# EAGLE board Rocket Controller ver2.00 (EAGLE 9.6.2)
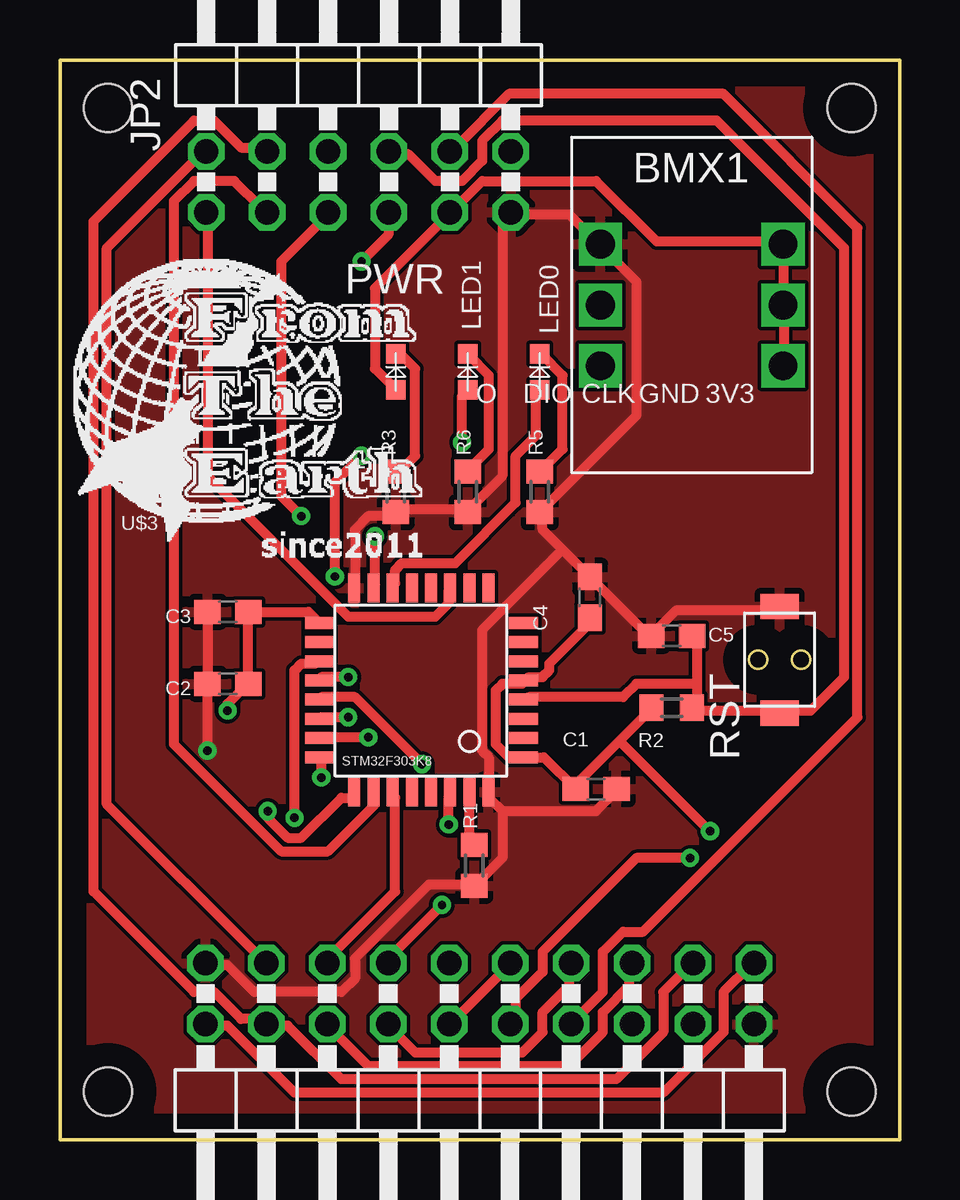
[diagram p0: board, top side]
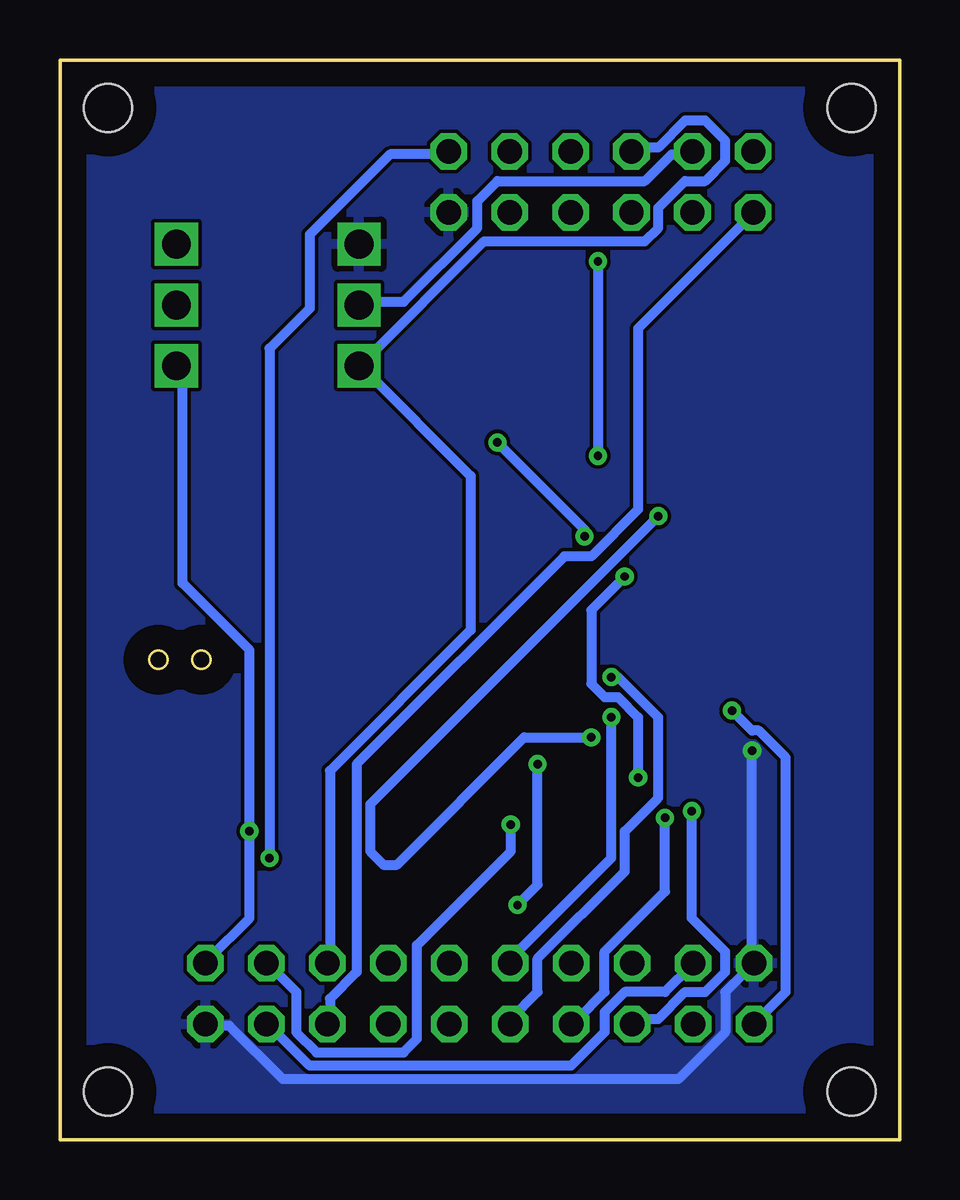
[diagram p1: board, bottom side, seen from below]

Size 35 x 45 mm. Coordinates in mm from the lower left corner, seen from the top.
Outline: 0,0 35,0 35,45 0,45 0,0
Copper layers (1*16): Top 0.035mm / dielectric 1.5mm / Bottom 0.035mm
Design rules "default": minimum track width 6mil, minimum drill 0.35mm, track to track 6mil, track to pad 6mil, pad to pad 6mil, via to via 6mil, smd to smd 6mil, copper to edge 40mil, drill to drill 6mil, minimum pad ring 10mil, minimum via ring 8mil, stop-mask expansion 4mil, vias tented up to drill 0mil, thermal gap 10mil
Net classes: 0 default: width 0.406 mm
Holes 2 mm at 2,43 33,43 33,2 2,2

## Footprints (pad centres in the part's own frame; a part is rotated, then mirrored left to right if it is on the bottom)
BMX055 = drill 1.2 pad 1.5 square: 3V3 8.81,-9.53; GND 1.19,-4.46; SCL 1.19,-9.53; SDA 1.19,-7; VCC 8.81,-4.46; VCCIO 8.81,-7
C1608 = smd 1.1 x 1: 1 -0.85,0; 2 0.85,0
2X06/90 = drill 1.016 octagon: 1 -6.35,-6.35; 2 -6.35,-3.81; 3 -3.81,-6.35; 4 -3.81,-3.81; 5 -1.27,-6.35; 6 -1.27,-3.81; 7 1.27,-6.35; 8 1.27,-3.81; 9 3.81,-6.35; 10 3.81,-3.81; 11 6.35,-6.35; 12 6.35,-3.81
2X10/90 = drill 1.016 octagon: 1 -11.43,-6.35; 2 -11.43,-3.81; 3 -8.89,-6.35; 4 -8.89,-3.81; 5 -6.35,-6.35; 6 -6.35,-3.81; 7 -3.81,-6.35; 8 -3.81,-3.81; 9 -1.27,-6.35; 10 -1.27,-3.81; 11 1.27,-6.35; 12 1.27,-3.81; 13 3.81,-6.35; 14 3.81,-3.81; 15 6.35,-6.35; 16 6.35,-3.81; 17 8.89,-6.35; 18 8.89,-3.81; 19 11.43,-6.35; 20 11.43,-3.81
OSXX1608C1A = smd 0.8 x 0.8: AN -0.75,0; CT 0.75,0
R0603 = smd 1 x 1.1: 1 -0.85,0; 2 0.85,0
TVAF06-A020B-R = smd 1.6 x 1.05: P$1 0,2.225; P$2 0,-2.225
STM32F303K8 = smd 0.5 x 1.2: BOOT 1.6,8.5; PA3/UART2_RX 0.8,0; PA4/SPI1_NSS 1.6,0; PA5/SPI1_SCK 2.4,0; PA6/SPI1_MISO 3.2,0; PA7/SPI1_MOSI 4,0; PA15/I2C1_SCL 6.4,8.5; PB0 4.8,0; PB1 5.6,0; PB3/SWO 5.6,8.5; PB4 4.8,8.5; PB5 4,8.5; PB6 3.2,8.5; PB7/I2C1_SDA 2.4,8.5; VSS 0.8,8.5; VSS2 6.4,0 | smd 1.2 x 0.5: NRST -0.65,4.65; PA0 -0.65,3.05; PA1 -0.65,2.25; PA2/UART2_TX -0.65,1.45; PA8 7.85,2.25; PA9/UART1_TX 7.85,3.05; PA10/UART1_RX 7.85,3.85; PA11/CAN_RX 7.85,4.65; PA12/CAN_TX 7.85,5.45; PA13/SWDIO 7.85,6.25; PA14/SWCLK 7.85,7.05; PF0 -0.65,6.25; PF1 -0.65,5.45; VDD -0.65,7.05; VDD2 7.85,1.45; VDDA -0.65,3.85

## Placement (x,y rotation side)
BMX1  BMX055  [BMX055]  21.34,41.78 0 top
C1  100nF  [C1608]  22.35,14.61 0 top
C2  100nF  [C1608]  7,19 180 top
C3  4.7uF  [C1608]  7,22 180 top
C4  10nF  [C1608]  22.1,22.61 90 top
C5  0.1uF  [C1608]  25.5,21 180 top
JP2  [2X06/90]  12.45,45 0 top
JP3  [2X10/90]  17.5,1 180 top
LED0  [OSXX1608C1A]  20,32 90 top
LED1  [OSXX1608C1A]  17,32 90 top
PWR  [OSXX1608C1A]  14,32 90 top
R1  10k  [R0603]  17.27,11.43 270 top
R2  10k or DNF  [R0603]  25.5,18 180 top
R3  100  [R0603]  14,27 90 top
R5  100  [R0603]  20,27 90 top
R6  100  [R0603]  17,27 90 top
RST  [TVAF06-A020B-R]  30,20 180 top
U$1  STM32F303K8  [STM32F303K8]  18.67,22.99 180 top
U$3  F.T.E.LOGO  [LOGO]  0,22.86 0 top

## Library data of the parts
BMX1 = BMX055
C1-C5 = rcl; SPICEPREFIX: C
JP2 JP3 = pinhead
LED0 LED1 PWR = Chip LED
R1-R3 R5 R6 = rcl; SPICEPREFIX: R
RST = Tact switch
U$1 = STM32F303K8
U$3 = logo

## Nets
+3V3: BMX1.3V3 BMX1.VCC BMX1.VCCIO C1.1 C2.1 C3.1 C4.1 JP2.9 JP3.1 JP3.20 PWR.AN R2.2 U$1.VDD U$1.VDD2 U$1.VDDA
+5V: JP2.2 JP3.4 JP3.17
BIT1: JP3.11 U$1.PA12/CAN_TX
BIT2: JP3.13 U$1.PA11/CAN_RX
BOOT0: R1.1 U$1.BOOT
FP_CHECKER: JP3.15 U$1.PB4
FPRAW: JP2.12 JP3.10
GND: BMX1.GND C1.2 C2.2 C3.2 C4.2 C5.2 JP2.11 JP3.2 JP3.19 R1.2 R3.1 R5.1 R6.1 RST.P$2 U$1.VSS U$1.VSS2
LED0: LED0.AN U$1.PB0
LED1: LED1.AN U$1.PB1
LOGRX: JP3.7 JP3.14 U$1.PA9/UART1_TX
LOGTX: JP3.9 JP3.12 U$1.PA10/UART1_RX
N$1: PWR.CT R3.2
N$2: LED0.CT R5.2
N$4: LED1.CT R6.2
NRST: C5.1 JP2.8 R2.1 RST.P$1 U$1.NRST
OSC_IN: U$1.PF0
OSC_OUT: U$1.PF1
PWM: JP2.1 JP3.6 U$1.PA5/SPI1_SCK
SCL: BMX1.SCL JP2.6 JP3.5 JP3.16 U$1.PA15/I2C1_SCL
SDA: BMX1.SDA JP2.4 JP3.3 JP3.18 U$1.PB7/I2C1_SDA
SW: JP2.10 JP3.8
SWCLK: JP2.7 U$1.PA14/SWCLK
SWDIO: JP2.5 U$1.PA13/SWDIO
SWO: JP2.3 U$1.PB3/SWO

## Tracks (layer width: path | path; a pad name or v marks a point on that pad's centre or on a via)
+3V3  (via drill 0.35)
  Top 0.406: U$1.VDD2 10.36,22 C3.1 C2.1 7.82,19 6.99,18.16 v6.99,17.88 | BMX1.3V3 30.18,32.41 30.18,34.65 BMX1.VCCIO 30.18,34.92 30.18,37.16 BMX1.VCC 29.9,37.44 24.87,37.44 22.35,39.95 17.6,39.95 16.48,38.84 JP2.9 16.2,38.56 13.13,35.48 13.13,32.13 13.97,31.29 PWR.AN | 23.33,16.62 21.51,14.81 C1.1 20.17,15.94 U$1.VDD 19.28,15.93 18.72,15.93 18.16,16.48 18.16,18.72 18.44,19 19.28,19 U$1.VDDA 19.56,19.28 20.12,19.28 20.4,19.56 20.4,19.84 22.07,21.51 C4.1 | 23.33,16.62 24.59,17.88 R2.2 | JP3.20 6.15,4.75 6.99,4.75 9.78,1.96 25.15,1.96 27.66,4.47 27.66,6.15 28.78,7.26 JP3.1 | v27.1,12.85 23.33,16.62
  Bottom 0.406: v6.99,17.88 6.15,17.04 5.87,17.04 4.75,15.93 4.75,6.15 5.87,5.03 JP3.20 | JP3.1 28.78,7.54 27.1,9.22 v27.1,12.85 27.1,20.4 29.9,23.19 29.9,32.13 BMX1.3V3
+5V
  Top 0.406: JP2.2 5.87,41.07 1.96,37.16 1.96,13.97 8.38,7.54 JP3.17
  Bottom 0.406: JP3.4 26.26,4.75 24.59,3.07 13.69,3.07 12.29,4.47 12.29,5.31 11.46,6.15 9.78,6.15 8.66,7.26 JP3.17
BIT1  (via drill 0.35)
  Top 0.406: v12.01,17.6 10.9,17.6 U$1.PA12/CAN_TX
  Bottom 0.406: v12.01,17.6 12.01,11.73 16.2,7.54 JP3.11
BIT2  (via drill 0.35)
  Top 0.406: v15.09,15.65 12.29,18.44 10.9,18.44 U$1.PA11/CAN_RX | v15.93,9.78 13.69,7.54 JP3.13
  Bottom 0.406: v15.09,15.65 15.09,10.62 v15.93,9.78
BOOT0
  Top 0.406: R1.1 17.04,12.29 17.04,14.25 U$1.BOOT
FP_CHECKER
  Top 0.406: U$1.PB4 13.97,14.25 13.97,10.34 11.18,7.54 JP3.15
FPRAW  (via drill 0.35)
  Top 0.406: v26.26,11.73 24.03,11.73 20.12,7.82 20.12,6.99 19,5.87 19,5.03 JP3.10
  Bottom 0.406: v26.26,11.73 26.26,32.97 24.59,34.65 24.59,37.72 21.23,41.07 19,41.07 JP2.12
GND  (via drill 0.35)
  Top 0.406: C3.2 6.15,21.79 6.15,19.28 C2.2 v6.15,16.2 | 18.44,13.69 18.44,11.73 17.32,10.62 R1.2 17.04,10.62 15.37,10.62 12.29,7.54 12.29,6.71 11.73,6.15 8.1,6.15 6.99,7.26 6.15,7.26 JP3.19 | 18.44,13.69 17.88,14.25 U$1.VSS 17.88,14.53 17.88,15.93 17.6,16.2 17.6,21.23 20.95,24.59 | 18.44,13.69 22.35,13.69 23.19,14.53 C1.2 | 20.95,24.59 22.07,23.47 C4.2 22.35,23.19 24.59,20.95 C5.2 24.87,21.23 25.7,22.07 29.9,22.07 RST.P$2 | 20.95,24.59 20.12,25.43 20.12,25.98 R5.1 20.12,26.26 24.03,30.18 24.03,35.76 22.63,37.16 BMX1.GND 22.35,37.44 21.23,38.56 19,38.56 JP2.11 18.72,38.56 18.44,38.28 18.44,27.66 17.04,26.26 R6.1 16.76,26.26 14.25,26.26 R3.1 13.97,25.98 12.85,25.98 12.29,25.43 12.29,23.19 U$1.VSS2
  Bottom 0.406: v6.15,16.2 6.15,7.54 JP3.19 6.15,7.26 7.26,6.15 7.26,4.47 9.22,2.52 25.7,2.52 27.94,4.75 28.78,4.75 JP3.2
  pour Top: -2.54,46.99 36.83,46.99 36.83,-2.54 -2.54,-2.54
  pour Bottom: -3.81,48.26 38.1,48.26 38.1,-3.81 -3.81,-3.81
LED0
  Top 0.406: LED0.AN 19.84,31.01 19.84,29.34 19,28.5 19,26.54 16.48,24.03 14.25,24.03 13.97,23.75 13.97,23.19 U$1.PB0
LED1  (via drill 0.35)
  Top 0.406: v16.76,29.06 16.76,31.01 LED1.AN | v13.13,25.15 13.13,23.19 U$1.PB1
  Bottom 0.406: v16.76,29.06 13.13,25.43 v13.13,25.15
LOGRX  (via drill 0.35)
  Top 0.406: v9.78,13.41 9.78,19.56 10.06,19.84 10.62,19.84 U$1.PA9/UART1_TX | JP3.7 21.23,7.26 21.23,6.43 20.12,5.31 20.12,4.47 19.28,3.63 14.81,3.63 13.69,4.75 JP3.14
  Bottom 0.406: v9.78,13.41 9.78,10.34 12.29,7.82 12.29,6.15 13.41,5.03 JP3.14
LOGTX  (via drill 0.35)
  Top 0.406: v12.01,19.28 10.9,19.28 U$1.PA10/UART1_RX | JP3.9 18.72,7.26 16.48,5.03 JP3.12
  Bottom 0.406: v12.01,19.28 11.73,19.28 10.06,17.6 10.06,14.25 11.46,12.85 11.46,11.18 15.09,7.54 15.09,6.15 16.2,5.03 JP3.12
N$1
  Top 0.406: PWR.CT 14.25,32.69 14.81,32.13 14.81,28.5 14.25,27.94 R3.2
N$2
  Top 0.406: LED0.CT 20.12,32.69 20.95,31.85 20.95,28.78 20.12,27.94 R5.2
N$4
  Top 0.406: LED1.CT 17.04,32.69 17.88,31.85 17.88,28.78 17.04,27.94 R6.2
NRST
  Top 0.406: 26.54,19 26.54,20.95 C5.1 | 26.54,19 26.54,18.16 R2.1 26.54,17.88 29.9,17.88 RST.P$1 30.18,17.88 31.29,17.88 32.69,19.28 32.69,37.16 27.38,42.47 18.44,42.47 17.6,41.63 17.6,40.79 16.76,39.95 15.65,39.95 14.53,41.07 13.97,41.07 JP2.8 | 26.54,19 24.03,19 23.47,18.44 19.56,18.44 U$1.NRST
PWM
  Top 0.406: U$1.PA5/SPI1_SCK 16.2,22.91 16.2,22.35 15.65,21.79 12.01,21.79 6.15,27.66 6.15,38.56 JP2.1
  Bottom 0.406: JP3.6 23.75,5.03 23.75,5.87 22.63,6.99 22.63,15.65 13.97,24.31 12.85,24.31 10.9,26.26 10.9,33.81 6.15,38.56 JP2.1
SCL  (via drill 0.35)
  Top 0.406: v8.66,13.69 8.66,13.41 9.5,12.57 10.06,12.57 11.73,14.25 12.29,14.25 U$1.PA15/I2C1_SCL | JP3.5 23.75,7.26 23.75,6.43 22.63,5.31 22.63,4.47 21.23,3.07 12.85,3.07 11.18,4.75 JP3.16
  Bottom 0.406: v8.66,13.69 8.66,9.22 7.26,7.82 7.26,6.99 8.1,6.15 8.94,6.15 10.06,5.03 10.9,5.03 JP3.16 | JP2.6 11.18,41.35 10.06,41.35 8.94,42.47 8.1,42.47 7.26,41.63 7.26,40.79 8.1,39.95 8.94,39.95 10.06,38.84 10.06,38 10.62,37.44 17.32,37.44 22.35,32.41 BMX1.SCL 22.35,32.13 17.88,27.66 17.88,21.23 23.75,15.37 23.75,7.54 JP3.5
SDA  (via drill 0.35)
  Top 0.406: v16.2,13.13 16.2,14.25 U$1.PB7/I2C1_SDA | JP3.3 26.26,7.26 25.15,6.15 25.15,4.47 23.19,2.52 11.73,2.52 9.5,4.75 8.66,4.75 JP3.18 8.38,5.03 7.54,5.03 6.43,6.15 5.59,6.15 1.4,10.34 1.4,38.28 5.59,42.47 6.43,42.47 7.54,41.35 8.38,41.35 JP2.4
  Bottom 0.406: JP2.4 8.66,41.07 9.5,41.07 10.62,39.95 16.76,39.95 17.6,39.12 17.6,38 20.68,34.92 22.35,34.92 BMX1.SDA | v16.2,13.13 16.2,12.01 20.12,8.1 20.12,4.19 20.68,3.63 24.31,3.63 25.15,4.47 25.15,6.15 26.26,7.26 JP3.3
SW
  Top 0.406: JP2.10 16.48,41.35 18.72,43.59 27.66,43.59 33.25,38 33.25,17.6 24.31,8.66 23.47,8.66 22.63,7.82 22.63,6.15 21.51,5.03 JP3.8
SWCLK  (via drill 0.35)
  Top 0.406: v10.9,15.09 10.9,15.93 U$1.PA14/SWCLK | v11.46,23.47 11.46,27.38 v12.57,28.5 | v12.57,36.6 13.69,37.72 13.69,38.56 JP2.7
  Bottom 0.406: v10.9,15.09 10.9,17.6 11.73,18.44 12.29,18.44 12.85,19 12.85,22.07 v11.46,23.47 | v12.57,36.6 v12.57,28.5
SWDIO  (via drill 0.35)
  Top 0.406: v12.85,16.76 10.9,16.76 U$1.PA13/SWDIO | v10.06,25.98 9.22,26.82 9.22,36.6 11.18,38.56 JP2.5
  Bottom 0.406: v12.85,16.76 15.65,16.76 20.95,11.46 21.51,11.46 22.07,12.01 22.07,13.97 v10.06,25.98
SWO
  Top 0.406: U$1.PB3/SWO 13.13,14.25 13.13,13.97 11.18,12.01 9.22,12.01 4.75,16.48 4.75,39.12 5.59,39.95 7.26,39.95 8.38,38.84 JP2.3

## Text on the board
tPlace: O | DIO | CLK | GND | 3V3